# Allegro board AC7Z010.brd
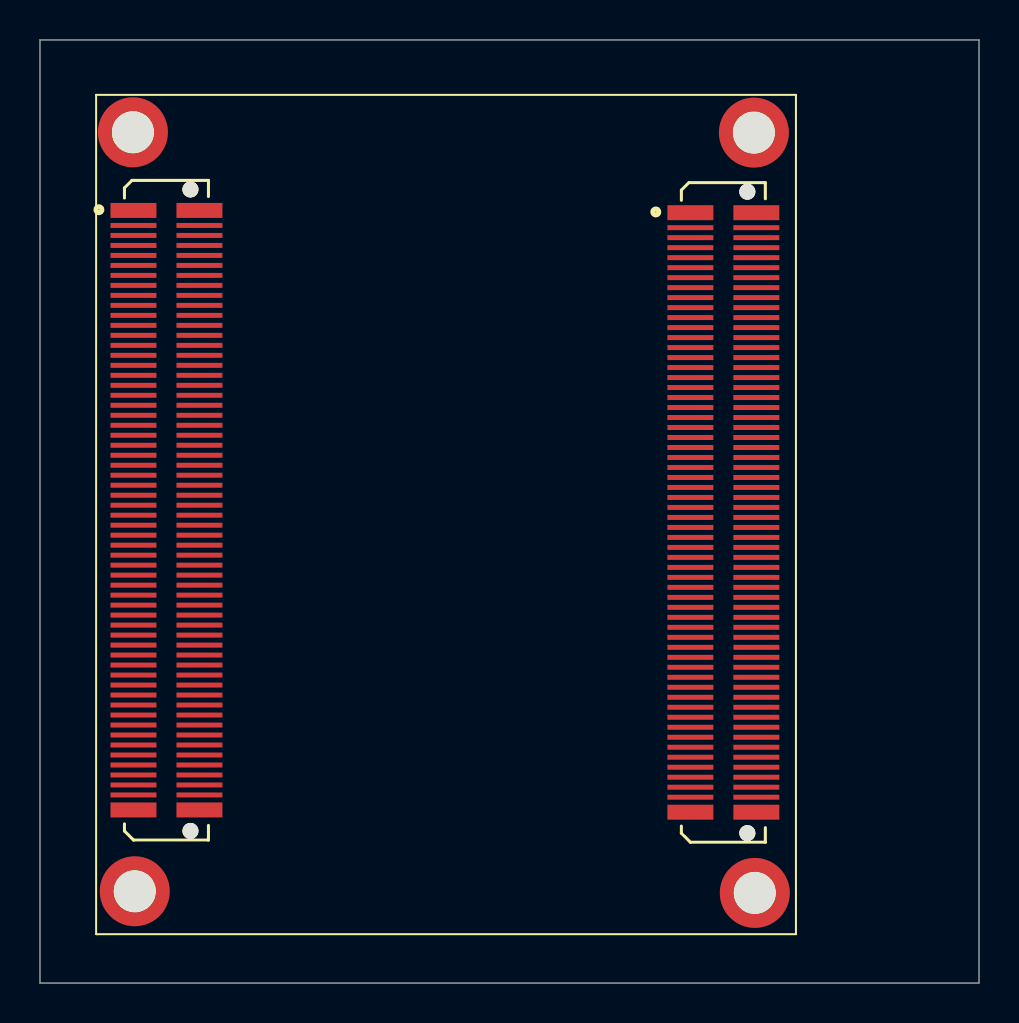
[diagram p0: board, top side]
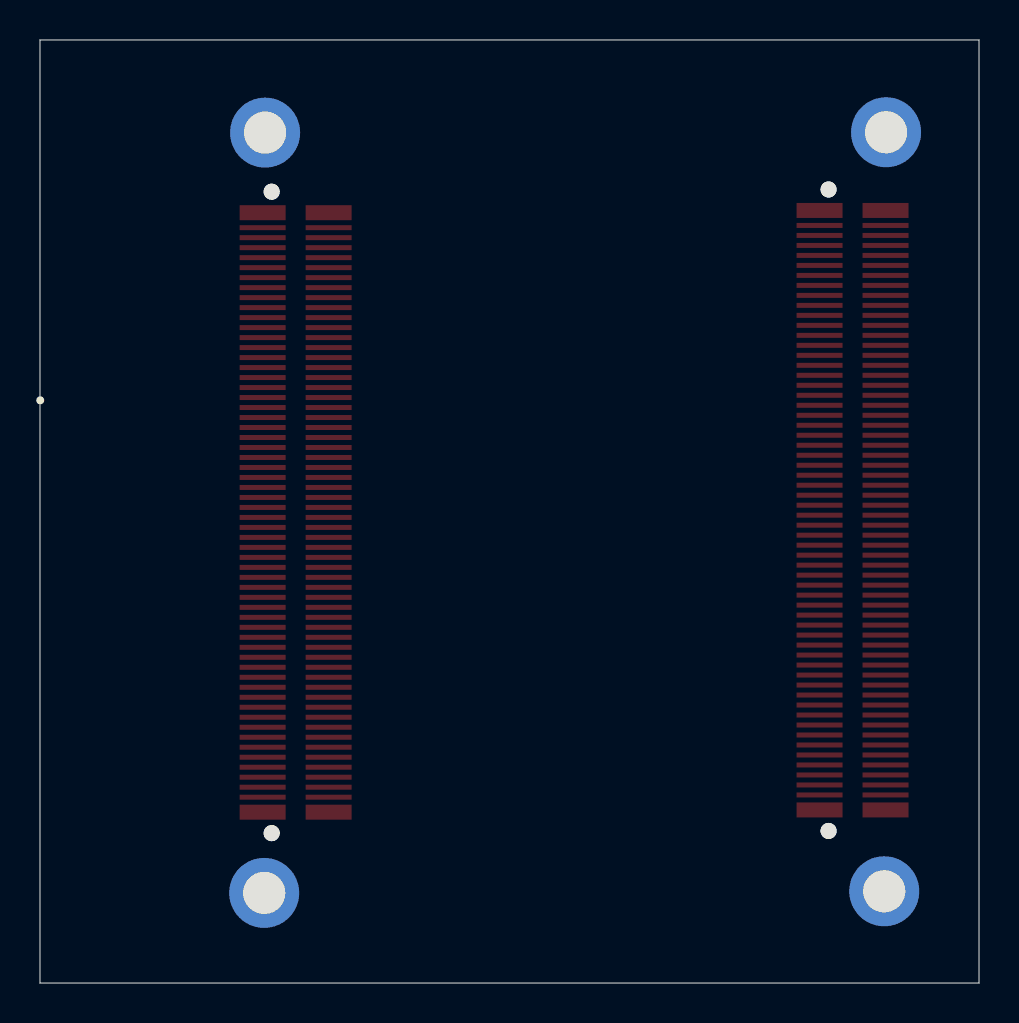
[diagram p1: board, bottom side, seen from below]

Outline 46.96 x 47.19 mm; copper layers: TOP, L2_GND, L3_SIG, L4_SIG, L5_GND, BOTTOM. Coordinates in mm from the lower left corner of the outline.
Outline path: 0,47.19 46.96,47.19 46.96,0 0,0 0,47.19

## Design rules (mm)
net group HDMI_D0_N: nets HDMI_D0_N HDMI_D0_P
net group IO1_10N: nets IO1_10N IO1_10P
net group IO1_12N: nets IO1_12N IO1_12P
net group IO1_15P: nets IO1_15N IO1_15P
net group IO1_17P: nets IO1_17N IO1_17P
net group IO2_10P: nets IO2_10N IO2_10P
net group PHY_MDI1_N: nets PHY_MDI1_N PHY_MDI1_P
net group PHY_MDI2_P: nets PHY_MDI2_N PHY_MDI2_P
net group PHY_MDI3_N: nets PHY_MDI3_N PHY_MDI3_P
net group BL-DIFF: nets HDMI_SCL HDMI_SDA KEY1 KEY2 KEY3 KEY4 PL_GCLK1
net group ETH_RX: nets ETH_RXCK ETH_RXCTL ETH_RXD0 ETH_RXD1 ETH_RXD2 ETH_RXD3
net group ETH_TX: nets ETH_TXCK ETH_TXCTL ETH_TXD0 ETH_TXD1 ETH_TXD2 ETH_TXD3
net group HDMI: nets HDMI_CLK_N HDMI_CLK_P HDMI_D1_N HDMI_D1_P HDMI_D2_N HDMI_D2_P LP_CLK_N LP_CLK_P LP_LANE0_N LP_LANE0_P LP_LANE1_N LP_LANE1_P MIPI_CLK_N MIPI_CLK_P MIPI_LAN0_N MIPI_LAN0_P MIPI_LAN1_N MIPI_LAN1_P VN VP XADC_AD1N XADC_AD1N_C XADC_AD1P XADC_AD1P_C XADC_AD9N XADC_AD9N_C XADC_AD9P XADC_AD9P_C XADC_AD12N XADC_AD12N_C XADC_AD12P XADC_AD12P_C XADC_VN_C XADC_VP_C
net group J20-DIFF: nets IO1_1N IO1_1P IO1_2N IO1_2P IO1_3N IO1_3P IO1_4N IO1_4P IO1_5N IO1_5P IO1_6N IO1_6P IO1_7N IO1_7P IO1_8N IO1_8P IO1_9N IO1_9P IO1_11N IO1_11P IO1_13N IO1_13P IO1_14N IO1_14P IO1_16N IO1_16P
net group J21-DIFF: nets IO2_1N IO2_1P IO2_2N IO2_2P IO2_3N IO2_3P IO2_4N IO2_4P IO2_5N IO2_5P IO2_6N IO2_6P IO2_7N IO2_7P IO2_8N IO2_8P IO2_9N IO2_9P IO2_11N IO2_11P IO2_12N IO2_12P IO2_13N IO2_13P IO2_14N IO2_14P IO2_15N IO2_15P IO2_16N IO2_16P IO2_17N IO2_17P
net group OTG_DATA: nets OTG_CLK OTG_DATA0 OTG_DATA1 OTG_DATA2 OTG_DATA3 OTG_DATA4 OTG_DATA5 OTG_DATA6 OTG_DATA7 OTG_DIR OTG_NXT OTG_STP
net group PHY_MDI: nets N20328299 N20328339 OTG_D_N OTG_D_P PHY_MDI0_N PHY_MDI0_P
nets with their own width: min track width 0.254; nets GND

## Placement (name value [footprint] x y rotation side)
J1  -  [AXK6A2337YG]  34.18 23.55 270 top
J2  -  [AXK6A2337YG]  6.32 23.66 270 top
NOREF  -  [unnamed]  4.74 4.59 0 top
NOREF#2  -  [unnamed]  35.75 4.51 0 top
NOREF#3  -  [unnamed]  4.65 42.57 0 top
NOREF#4  -  [#2]  206.37 27.98 0 top
NOREF#5  -  [unnamed]  35.71 42.56 0 top

## Library data of the parts
J1 J2 = CONN SOCKET 60x2_0

## Footprints (pads in the part's own frame, mm; a bottom-side part is the same pattern mirrored in y, then rotated)
AXK6A2337YG
  round 0.8 hole 0.8 unplated: (-16.05,1.2) (16.05,1.2)
  rect 0.75x2.3 smd: 1(-15,-1.65) 2(-15,1.65) 119(15,-1.65) 120(15,1.65)
  rect 0.25x2.3 smd: 3(-14.25,-1.65) 4(-14.25,1.65) 5(-13.75,-1.65) 6(-13.75,1.65) 7(-13.25,-1.65) 8(-13.25,1.65) 9(-12.75,-1.65) 10(-12.75,1.65) 11(-12.25,-1.65) 12(-12.25,1.65) 13(-11.75,-1.65) 14(-11.75,1.65) 15(-11.25,-1.65) 16(-11.25,1.65) 17(-10.75,-1.65) 18(-10.75,1.65) 19(-10.25,-1.65) 20(-10.25,1.65) 21(-9.75,-1.65) 22(-9.75,1.65) 23(-9.25,-1.65) 24(-9.25,1.65) 25(-8.75,-1.65) 26(-8.75,1.65) 27(-8.25,-1.65) 28(-8.25,1.65) 29(-7.75,-1.65) 30(-7.75,1.65) 31(-7.25,-1.65) 32(-7.25,1.65) 33(-6.75,-1.65) 34(-6.75,1.65) 35(-6.25,-1.65) 36(-6.25,1.65) 37(-5.75,-1.65) 38(-5.75,1.65) 39(-5.25,-1.65) 40(-5.25,1.65) 41(-4.75,-1.65) 42(-4.75,1.65) 43(-4.25,-1.65) 44(-4.25,1.65) 45(-3.75,-1.65) 46(-3.75,1.65) 47(-3.25,-1.65) 48(-3.25,1.65) 49(-2.75,-1.65) 50(-2.75,1.65) 51(-2.25,-1.65) 52(-2.25,1.65) 53(-1.75,-1.65) 54(-1.75,1.65) 55(-1.25,-1.65) 56(-1.25,1.65) 57(-0.75,-1.65) 58(-0.75,1.65) 59(-0.25,-1.65) 60(-0.25,1.65) 61(0.25,-1.65) 62(0.25,1.65) 63(0.75,-1.65) 64(0.75,1.65) 65(1.25,-1.65) 66(1.25,1.65) 67(1.75,-1.65) 68(1.75,1.65) 69(2.25,-1.65) 70(2.25,1.65) 71(2.75,-1.65) 72(2.75,1.65) 73(3.25,-1.65) 74(3.25,1.65) 75(3.75,-1.65) 76(3.75,1.65) 77(4.25,-1.65) 78(4.25,1.65) 79(4.75,-1.65) 80(4.75,1.65) 81(5.25,-1.65) 82(5.25,1.65) 83(5.75,-1.65) 84(5.75,1.65) 85(6.25,-1.65) 86(6.25,1.65) 87(6.75,-1.65) 88(6.75,1.65) 89(7.25,-1.65) 90(7.25,1.65) 91(7.75,-1.65) 92(7.75,1.65) 93(8.25,-1.65) 94(8.25,1.65) 95(8.75,-1.65) 96(8.75,1.65) 97(9.25,-1.65) 98(9.25,1.65) 99(9.75,-1.65) 100(9.75,1.65) 101(10.25,-1.65) 102(10.25,1.65) 103(10.75,-1.65) 104(10.75,1.65) 105(11.25,-1.65) 106(11.25,1.65) 107(11.75,-1.65) 108(11.75,1.65) 109(12.25,-1.65) 110(12.25,1.65) 111(12.75,-1.65) 112(12.75,1.65) 113(13.25,-1.65) 114(13.25,1.65) 115(13.75,-1.65) 116(13.75,1.65) 117(14.25,-1.65) 118(14.25,1.65)
unnamed
  round 3.5 hole 2.1: 1(0,0)

## Nets
GND: J1.9(5) J1.10(65) J1.19(10) J1.20(70) J1.29(15) J1.30(75) J1.39(20) J1.40(80) J1.49(25) J1.50(85) J1.59(30) J1.60(90) J1.69(35) J1.70(95) J1.79(40) J1.80(100) J1.89(45) J1.90(105) J1.99(50) J1.100(110) J1.109(55) J1.110(115) J2.9(5) J2.10(65) J2.19(10) J2.20(70) J2.29(15) J2.30(75) J2.39(20) J2.40(80) J2.49(25) J2.50(85) J2.59(30) J2.60(90) J2.69(35) J2.70(95) J2.79(40) J2.80(100) J2.89(45) J2.90(105) J2.99(50) J2.100(110) J2.109(55) J2.110(115)
VCC5V: J1.1 J1.2(61) J1.3(2) J1.4(62) J1.5(3) J1.6(63) J1.7(4) J1.8(64)
VCCIO_34: J1.11(6) J1.13(7) J1.15(8) J1.17(9)
VCCIO_35: J1.12(66) J1.14(67) J1.16(68) J1.18(69)
485_DE1: J2.82(101)
485_DE2: J1.35(18)
485_RXD1: J2.84(102)
485_RXD2: J1.71(36)
485_TXD1: J2.112(116)
485_TXD2: J1.73(37)
CAM_CLK: J1.85(43)
CAM_GPIO: J1.87(44)
CAM_SCL: J1.93(47)
CAM_SDA: J1.91(46)
CAN0_RX: J2.76(98)
CAN0_TX: J2.78(99)
CAN1_RX: J2.92(106)
CAN1_TX: J2.74(97)
ETH_MDC: J2.102(111)
ETH_MDIO: J2.118(119)
ETH_RXCK: J2.61(31)
ETH_RXCTL: J2.63(32)
ETH_RXD0: J2.65(33)
ETH_RXD1: J2.67(34)
ETH_RXD2: J2.71(36)
ETH_RXD3: J2.73(37)
ETH_TXCK: J2.77(39)
ETH_TXCTL: J2.75(38)
ETH_TXD0: J2.87(44)
ETH_TXD1: J2.85(43)
ETH_TXD2: J2.83(42)
ETH_TXD3: J2.81(41)
FAN_PWM: J2.88(104)
FPGA_DONE: J1.118(119)
FPGA_TCK: J1.111(56)
FPGA_TDI: J1.117(59)
FPGA_TDO: J1.115(58)
FPGA_TMS: J1.113(57)
HDMI_CLK_N: J1.38(79)
HDMI_CLK_P: J1.36(78)
HDMI_D0_N: J1.34(77)
HDMI_D0_P: J1.32(76)
HDMI_D1_N: J1.28(74)
HDMI_D1_P: J1.26(73)
HDMI_D2_N: J1.24(72)
HDMI_D2_P: J1.22(71)
HDMI_SCL: J1.42(81)
HDMI_SDA: J1.44(82)
I2C_SCL_1V8: J2.62(91)
I2C_SDA_1V8: J2.104(112)
IO1_1N: J1.76(98)
IO1_1P: J1.78(99)
IO1_2N: J1.72(96)
IO1_2P: J1.74(97)
IO1_3N: J1.66(93)
IO1_3P: J1.68(94)
IO1_4N: J1.75(38)
IO1_4P: J1.77(39)
IO1_5N: J1.62(91)
IO1_5P: J1.64(92)
IO1_6N: J1.56(88)
IO1_6P: J1.58(89)
IO1_7N: J1.61(31)
IO1_7P: J1.63(32)
IO1_8N: J1.65(33)
IO1_8P: J1.67(34)
IO1_9N: J1.52(86)
IO1_9P: J1.54(87)
IO1_10N: J1.46(83)
IO1_10P: J1.48(84)
IO1_11N: J1.55(28)
IO1_11P: J1.57(29)
IO1_12N: J1.51(26)
IO1_12P: J1.53(27)
IO1_13N: J1.45(23)
IO1_13P: J1.47(24)
IO1_14N: J1.41(21)
IO1_14P: J1.43(22)
IO1_15N: J1.31(16)
IO1_15P: J1.33(17)
IO1_16N: J1.25(13)
IO1_16P: J1.27(14)
IO1_17N: J1.21(11)
IO1_17P: J1.23(12)
IO2_1N: J2.23(12)
IO2_1P: J2.21(11)
IO2_2N: J2.13(7)
IO2_2P: J2.11(6)
IO2_3N: J2.17(9)
IO2_3P: J2.15(8)
IO2_4N: J2.3(2)
IO2_4P: J2.1
IO2_5N: J2.7(4)
IO2_5P: J2.5(3)
IO2_6N: J2.25(13)
IO2_6P: J2.27(14)
IO2_7N: J2.18(69)
IO2_7P: J2.16(68)
IO2_8N: J2.22(71)
IO2_8P: J2.24(72)
IO2_9N: J2.26(73)
IO2_9P: J2.28(74)
IO2_10N: J2.31(16)
IO2_10P: J2.33(17)
IO2_11N: J2.32(76)
IO2_11P: J2.34(77)
IO2_12N: J2.36(78)
IO2_12P: J2.38(79)
IO2_13N: J2.35(18)
IO2_13P: J2.37(19)
IO2_14N: J2.41(21)
IO2_14P: J2.43(22)
IO2_15N: J2.45(23)
IO2_15P: J2.47(24)
IO2_16N: J2.51(26)
IO2_16P: J2.53(27)
IO2_17N: J2.55(28)
IO2_17P: J2.57(29)
IO13_L14N: J1.86(103)
IO13_L14P: J1.88(104)
IO13_L16N: J1.97(49)
IO13_L16P: J1.95(48)
IO13_L21N: J1.84(102)
IO13_L21P: J1.82(101)
IO13_L22N: J1.92(106)
IO13_L22P: J1.94(107)
KEY1: J2.58(89)
KEY2: J2.56(88)
KEY3: J2.54(87)
KEY4: J2.52(86)
LED1: J2.48(84)
LED2: J2.46(83)
LED3: J2.44(82)
LED4: J2.42(81)
LP_CLK_N: J1.98(109)
LP_CLK_P: J1.96(108)
LP_LANE0_N: J1.106(113)
LP_LANE0_P: J1.108(114)
LP_LANE1_N: J1.104(112)
LP_LANE1_P: J1.102(111)
MIPI_CLK_N: J1.83(42)
MIPI_CLK_P: J1.81(41)
MIPI_LAN0_N: J1.107(54)
MIPI_LAN0_P: J1.105(53)
MIPI_LAN1_N: J1.103(52)
MIPI_LAN1_P: J1.101(51)
OTG_CLK: J2.113(57)
OTG_DATA0: J2.107(54)
OTG_DATA1: J2.105(53)
OTG_DATA2: J2.103(52)
OTG_DATA3: J2.101(51)
OTG_DATA4: J2.97(49)
OTG_DATA5: J2.95(48)
OTG_DATA6: J2.93(47)
OTG_DATA7: J2.91(46)
OTG_DIR: J2.115(58)
OTG_NXT: J2.111(56)
OTG_RESETN: J2.66(93)
OTG_STP: J2.117(59)
PL_GCLK1: J1.37(19)
PS_MIO8: J2.86(103)
PS_POR_B: J1.116(118)
QSPI_D2_PS_MIO4: J2.120
QSPI_D3_PS_MIO5: J2.119(60)
RTC_SQW: J2.72(96)
SD_CD: J2.94(107)
SD_CLK: J2.106(113)
SD_CMD: J2.68(94)
SD_D0: J2.114(117)
SD_D1: J2.116(118)
SD_D2: J2.108(114)
SD_D3: J2.64(92)
UART_RX: J2.98(109)
UART_TX: J2.96(108)
VN: J1.114(117)
VP: J1.112(116)
XADC_AD1N: J2.12(66)
XADC_AD1P: J2.14(67)
XADC_AD9N: J2.8(64)
XADC_AD9P: J2.6(63)
XADC_AD12N: J2.2(61)
XADC_AD12P: J2.4(62)

Pads without a net: J1 119 120; NOREF 1; NOREF#2 1; NOREF#3 1; NOREF#5 1

## Text on the board
User.11: 10.CONTROLLED IMPENDANCE 50 OHM +/-10% | 6.TOLERANCE: HOLES DIAMETER {NPTH} +/-0.003" | 7.LINE WIDTH/SPACING: +/-20% | 8.ALL VIAS ARE TENTED | 9.CONTROLLED DIFFERENTAIL IMPEDANCE 100 OHM +/-10% | {EDGE TO EDGE/CENTRE TO EDGE} +/-0.005" | LINE WITH IMPEDANCE CHART FOR REFERENCE | HOLES {CENTRE TO CENTRE} +/-0.003" | OUTLINE {DATUM TO HOLES} +/-0.003" | L1 | L2 | L3 | L4 | L5 | L6 | (GND) | {DATUM TO EDGE} +/-0.005" | LAYER 1      L1 TOP | LAYER 2      L2 GND | LAYER 3      L3 INNER | LAYER 4      L4 INNER | LAYER 5      L5 GND | LAYER 6      L6 BOTTOM | SINGLE ENDED | 50ohm | WIDTH | GOLD 0.05um MINIMUM | 6mil | 5mil | TOP SIDE | {PTH} +/-0.003" | (WIDTH/SPACE) | DIFF-PAIR | 5mil/6mil | 100ohm | 0.333oz | 1oz
User.45: FIGURE | SIZE | 8.0 | 12.0 | 31.5 | 35.0 | 35.04 | 36.0 | 36.22 | 37.0 | 40.0 | 43.31 | 47.0 | 50.0 | 51.18 | 70.87 | 82.68 | 90.55 | 130.0 | 129.92 | 55.12x15.75 | 59.06x39.37 | 102.36x31.5 | 106.3x35.43 | DRILL CHART: TOP to BOTTOM | ALL UNITS ARE IN MILS | TOLERANCE | +3.0/-3.0 | PLATED | NON-PLATED | QTY | 75 | 559 | 1 | 80 | 10 | 2 | 3 | 4 | 12 | 8
